# EAGLE board n64rgb2moutfilter_nutzen (EAGLE 9.5.2)
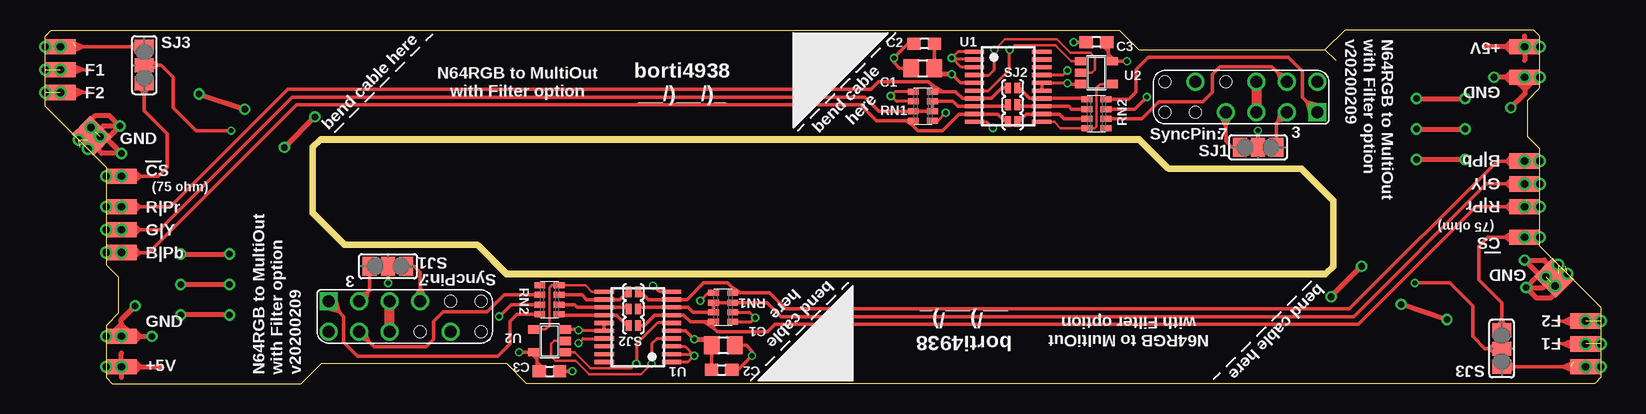
[diagram p0: board, top side]
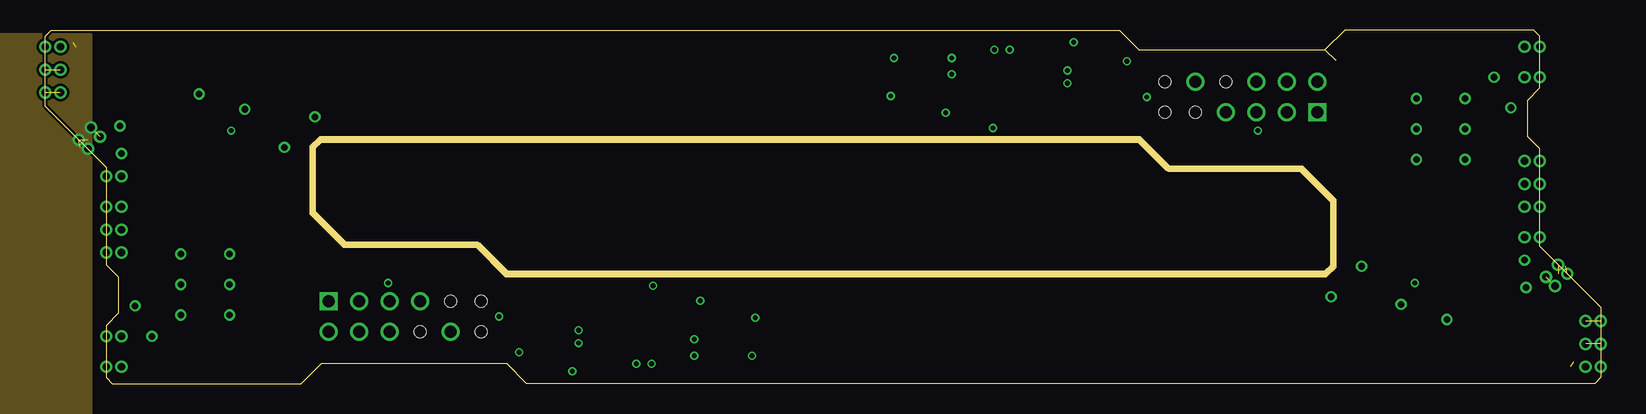
[diagram p1: board, inner layer Route2]
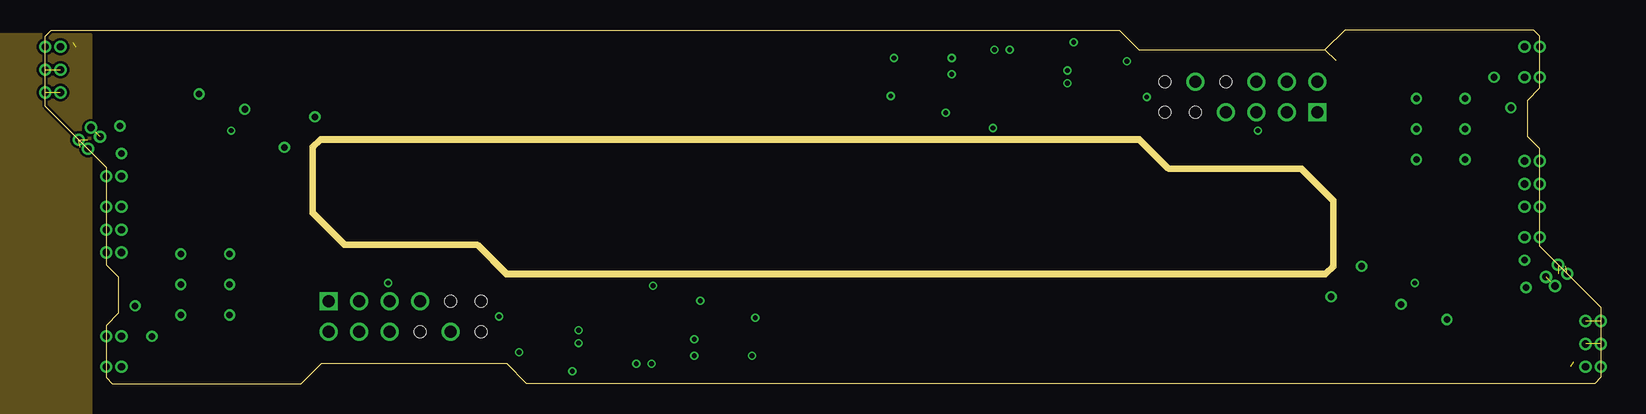
[diagram p2: board, inner layer Route15]
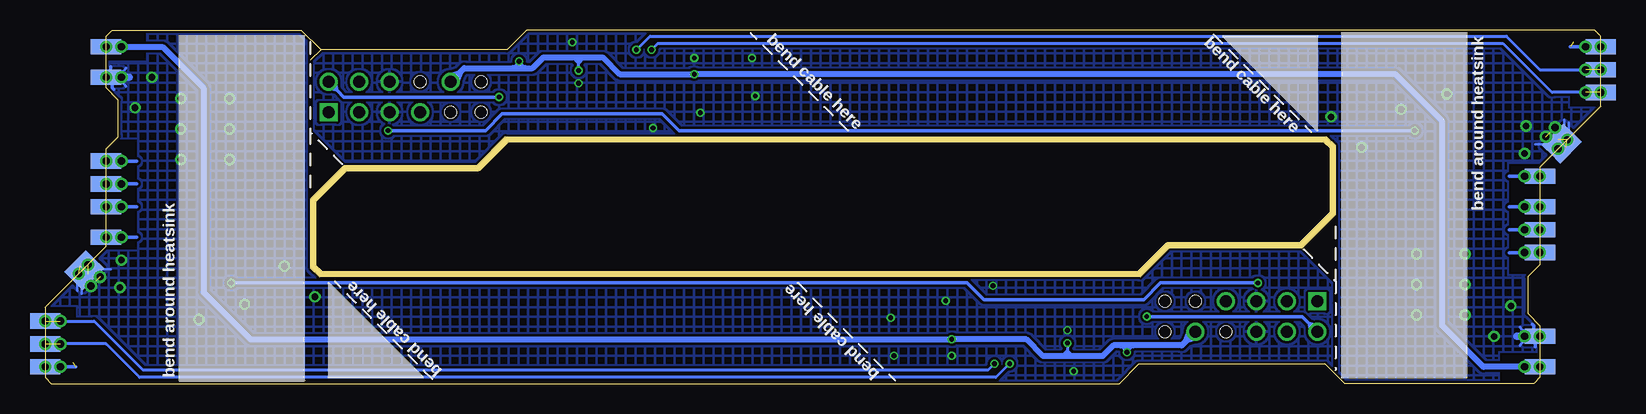
[diagram p3: board, bottom side, seen from below]

Size 129.67 x 29.46 mm. Coordinates in mm from the lower left corner, seen from the top.
Outline: 106.68,27.81 91.19,27.81 89.53,29.46 0.51,29.46 0,28.96 0,23.11 5.08,18.03 5.08,9.91 6.1,8.89 6.1,5.84 5.08,4.83 5.08,0.51 5.59,0 21.34,0 22.99,1.65 38.48,1.65 40.13,0 129.16,0 129.67,0.51 129.67,6.35 124.59,11.43 124.59,19.56 123.57,20.57 123.57,23.62 124.59,24.64 124.59,28.96 124.08,29.46 108.33,29.46 106.68,27.81
Outline: 106.68,27.81 107.57,26.92
Outline: 22.1,14.1 22.1,19.81 22.86,20.57 91.31,20.57 93.73,18.16 104.78,18.16 107.57,15.37 107.57,9.65 106.81,8.89 38.35,8.89 35.94,11.3 24.89,11.3 22.1,14.1
Copper layers (1*16): Top 0.018mm / dielectric 1.55mm / Bottom 0.018mm
Design rules "fpc": minimum track width 0.1mm, minimum drill 0.2mm, track to track 0.2mm, track to pad 0.2mm, pad to pad 0.2mm, via to via 0.2mm, smd to smd 0mil, copper to edge 0.2mm, drill to drill 0.2mm, minimum pad ring 0.125mm, minimum via ring 0.1mm, stop-mask expansion 2mil, vias tented up to drill 1mm, thermal gap 0.2mm
bRestrict: area 5.1,-0.3 to 8.4,2.5; area 5.1,9.1 to 7.6,18.3; area 0,23.1 to 2.5,32.3; area 121.3,26.9 to 124.6,29.7; area 122,11.2 to 124.6,20.3; area 127.1,-2.8 to 129.7,6.4; 6 lines
Milling: 12 lines

## Footprints (pad centres in the part's own frame; a part is rotated, then mirrored left to right if it is on the bottom)
SMD1,27-2,54 = smd 1.27 x 2.54: 1 0,0
C0805 = smd 1.3 x 1.5: 1 -0.95,0; 2 0.95,0
C0603 = smd 1.1 x 1: 1 -0.85,0; 2 0.85,0
SNES_MULTIAV_RGBSY = drill 1 square: 1 6.35,-1.27 | drill 1: 2 6.35,1.27; 3 3.81,-1.27; 4 3.81,1.27; 5 1.27,-1.27; 6 1.27,1.27; 7 -1.27,-1.27; 10 -3.81,1.27 | hole 1: -3.81,-1.27; -6.35,-1.27; -6.35,1.27; -1.27,1.27
CTS742C083 = smd 0.5 x 0.9: 1 -1.2,-0.8; 2 -0.4,-0.8; 3 0.4,-0.8; 4 1.2,-0.8; 5 1.2,0.8; 6 0.4,0.8; 7 -0.4,0.8; 8 -1.2,0.8
SJ_2 = smd 1.168 x 1.6: 1 -1.524,0; 2 0,0; 3 1.524,0
SJ_SMALL = smd 0.508 x 0.889: 1 -0.381,0; 2 0.381,0
THS7368 = smd 1.6 x 0.35: 1 -2.8,2.895; 2 -2.8,2.245; 3 -2.8,1.595; 4 -2.8,0.945; 5 -2.8,0.295; 6 -2.8,-0.355; 7 -2.8,-1.005; 8 -2.8,-1.655; 9 -2.8,-2.305; 10 -2.8,-2.955; 11 2.8,-2.955; 12 2.8,-2.305; 13 2.8,-1.655; 14 2.8,-1.005; 15 2.8,-0.355; 16 2.8,0.295; 17 2.8,0.945; 18 2.8,1.595; 19 2.8,2.245; 20 2.8,2.895
SOT23-5 = smd 0.69 x 0.99: 1 -0.95,-1.29; 2 0,-1.29; 3 0.95,-1.29; 4 0.95,1.3; 5 -0.95,1.3

## Placement (x,y rotation side)
B/PB  [SMD1,27-2,54]  6.35,10.92 90 top
B/PB1  [SMD1,27-2,54]  5.08,10.92 90 bottom
B/PB2  [SMD1,27-2,54]  123.32,18.54 270 top
B/PB3  [SMD1,27-2,54]  124.59,18.54 270 bottom
C1  22u  [C0805]  73.15,26.29 0 top
C2  0.1u  [C0603]  73.28,28.32 180 top
C3  0.1u  [C0603]  87.63,28.45 180 top
C4  22u  [C0805]  56.52,3.17 180 top
C5  0.1u  [C0603]  56.39,1.14 0 top
C6  0.1u  [C0603]  42.04,1.02 0 top
CS75#  [SMD1,27-2,54]  6.35,17.27 90 top
CS75#1  [SMD1,27-2,54]  5.08,17.27 90 bottom
CS75#2  [SMD1,27-2,54]  123.32,12.19 270 top
CS75#3  [SMD1,27-2,54]  124.59,12.19 270 bottom
CS#  [SMD1,27-2,54]  0,28.07 90 bottom
CS#1  [SMD1,27-2,54]  1.27,28.07 90 top
CS#2  [SMD1,27-2,54]  129.67,1.4 270 bottom
CS#3  [SMD1,27-2,54]  128.4,1.4 270 top
E$1  [SNES_MULTIAV_RGBSY]  99.69,23.88 0 top
E$2  [SNES_MULTIAV_RGBSY]  29.97,5.59 180 top
F1  [SMD1,27-2,54]  0,26.16 90 bottom
F2  [SMD1,27-2,54]  0,24.26 90 bottom
F3  [SMD1,27-2,54]  1.27,24.26 90 top
F4  [SMD1,27-2,54]  1.27,26.16 90 top
F5  [SMD1,27-2,54]  129.67,3.3 270 bottom
F6  [SMD1,27-2,54]  129.67,5.21 270 bottom
F7  [SMD1,27-2,54]  128.4,5.21 270 top
F8  [SMD1,27-2,54]  128.4,3.3 270 top
G/Y  [SMD1,27-2,54]  6.35,12.83 90 top
G/Y1  [SMD1,27-2,54]  5.08,12.83 90 bottom
G/Y2  [SMD1,27-2,54]  123.32,16.64 270 top
G/Y3  [SMD1,27-2,54]  124.59,16.64 270 bottom
P_GND1  [SMD1,27-2,54]  5.08,3.94 90 bottom
P_GND2  [SMD1,27-2,54]  6.35,3.94 90 top
P_GND3  [SMD1,27-2,54]  4.19,20.96 45 top
P_GND4  [SMD1,27-2,54]  3.56,20.32 45 top
P_GND5  [SMD1,27-2,54]  2.92,19.69 315 bottom
P_GND6  [SMD1,27-2,54]  3.56,20.32 315 bottom
P_GND7  [SMD1,27-2,54]  123.32,25.53 270 top
P_GND8  [SMD1,27-2,54]  125.48,8.51 225 top
P_GND9  [SMD1,27-2,54]  126.11,9.14 225 top
P_GND10  [SMD1,27-2,54]  124.59,25.53 270 bottom
P_GND11  [SMD1,27-2,54]  126.75,9.78 135 bottom
P_GND12  [SMD1,27-2,54]  126.11,9.14 135 bottom
P_VCC_5V  [SMD1,27-2,54]  6.35,1.4 90 top
P_VCC_5V1  [SMD1,27-2,54]  5.08,1.4 90 bottom
P_VCC_5V2  [SMD1,27-2,54]  123.32,28.07 270 top
P_VCC_5V3  [SMD1,27-2,54]  124.59,28.07 270 bottom
R/PR  [SMD1,27-2,54]  6.35,14.73 90 top
R/PR1  [SMD1,27-2,54]  5.08,14.73 90 bottom
R/PR2  [SMD1,27-2,54]  123.32,14.73 270 top
R/PR3  [SMD1,27-2,54]  124.59,14.73 270 bottom
RN1  75  [CTS742C083]  73.15,23.11 90 top
RN2  75  [CTS742C083]  87.63,22.48 270 top
RN3  75  [CTS742C083]  56.52,6.35 270 top
RN4  75  [CTS742C083]  42.04,6.99 90 top
SJ1  [SJ_2]  101.09,19.69 180 top
SJ2  [SJ_2]  28.57,9.78 0 top
SJ2B  [SJ_SMALL]  80.64,24.64 0 top
SJ2B1  [SJ_SMALL]  49.02,4.83 180 top
SJ2G  [SJ_SMALL]  80.64,23.24 0 top
SJ2G1  [SJ_SMALL]  49.02,6.22 180 top
SJ2R  [SJ_SMALL]  80.64,21.84 0 top
SJ2R1  [SJ_SMALL]  49.02,7.62 180 top
SJ3  [SJ_2]  8.26,26.54 270 top
SJ4  [SJ_2]  121.41,2.92 90 top
U1  [THS7368]  80.26,24.77 0 top
U2  [SOT23-5]  87.63,25.91 270 top
U3  [THS7368]  49.4,4.7 180 top
U4  [SOT23-5]  42.04,3.56 90 top

## Library data of the parts
B/PB B/PB1-B/PB3 CS75# CS75#1-CS75#3 CS# CS#1-CS#3 F1-F8 G/Y G/Y1-G/Y3 P_GND1-P_GND3 P_GND7 P_GND8 P_GND10 P_VCC_5V P_VCC_5V1-P_VCC_5V3 R/PR R/PR1-R/PR3 = wirepad@1
C1-C6 = rcl
E$1 E$2 U1 U3 = snes_div
P_GND4-P_GND6 P_GND9 P_GND11 P_GND12 = wirepad
RN1-RN4 = resistor-net
SJ1 SJ2 SJ2B SJ2B1 SJ2G SJ2G1 SJ2R SJ2R1 SJ3 SJ4 = jumper
U2 U4 = 74xx-little-de

## Nets
5V: C1.2 C2.1 C3.1 E$1.10 P_VCC_5V1.1 P_VCC_5V.1 U1.5 U1.17 U2.5
5V1: C4.2 C5.1 C6.1 E$2.10 P_VCC_5V2.1 P_VCC_5V3.1 U3.5 U3.17 U4.5
#CS: E$1.3 SJ1.1
#CS1: E$2.3 SJ2.1
#CS.75.I: CS75#1.1 CS75#.1 SJ3.3
#CS.75.I1: CS75#2.1 CS75#3.1 SJ4.3
#CS.I: CS#1.1 CS#.1 SJ3.1
#CS.I1: CS#2.1 CS#3.1 SJ4.1
#CS.SEL: SJ1.2 SJ3.2
#CS.SEL1: SJ2.2 SJ4.2
BLUE: B/PB1.1 B/PB.1 RN1.8 SJ2R.1 U1.9
BLUE1: B/PB2.1 B/PB3.1 RN3.8 SJ2R1.1 U3.9
BLUE.OUT: RN2.3 SJ2R.2 U1.12
BLUE.OUT1: RN4.3 SJ2R1.2 U3.12
BLUE.OUT.1: E$2.4 RN4.6
BLUE.OUT.75: E$1.4 RN2.6
BYPASS_SF: RN2.4 U1.11 U2.4
BYPASS_SF1: RN4.4 U3.11 U4.4
F1: F1.1 F4.1 U1.6 U2.1
F2: F2.1 F3.1 U1.4 U2.2
F3: F5.1 F8.1 U3.6 U4.1
F4: F6.1 F7.1 U3.4 U4.2
GND: C1.1 C2.2 C3.2 E$1.5 E$1.6 P_GND1.1 P_GND2.1 P_GND3.1 P_GND4.1 P_GND5.1 P_GND6.1 RN1.1 RN1.5 RN1.6 U1.1 U1.2 U1.3 U1.10 U1.15 U1.16 U2.3
GND1: C4.1 C5.2 C6.2 E$2.5 E$2.6 P_GND7.1 P_GND8.1 P_GND9.1 P_GND10.1 P_GND11.1 P_GND12.1 RN3.1 RN3.5 RN3.6 U3.1 U3.2 U3.3 U3.10 U3.15 U3.16 U4.3
GREEN: G/Y1.1 G/Y.1 RN1.2 RN1.3 RN1.7 SJ2G.1 U1.8
GREEN1: G/Y2.1 G/Y3.1 RN3.2 RN3.3 RN3.7 SJ2G1.1 U3.8
GREEN.OUT: RN2.2 SJ2G.2 U1.13
GREEN.OUT1: RN4.2 SJ2G1.2 U3.13
GREEN.OUT.1: E$2.2 RN4.7
GREEN.OUT.75: E$1.2 RN2.7
LUMA: E$1.7 SJ1.3
LUMA1: E$2.7 SJ2.3
RED: R/PR1.1 R/PR.1 RN1.4 SJ2B.1 U1.7
RED1: R/PR2.1 R/PR3.1 RN3.4 SJ2B1.1 U3.7
RED1.OUT: RN2.1 SJ2B.2 U1.14
RED1.OUT1: RN4.1 SJ2B1.2 U3.14
RED.OUT.1: E$2.1 RN4.8
RED.OUT.75: E$1.1 RN2.8

## Tracks (layer width: path | path; a pad name or v marks a point on that pad's centre or on a via)
5V  (via drill 0.4, 0.6)
  Top 0.254: v85.22,26.09 84.84,25.71 U1.17
  Top 0.305: C1.2 74.1,26.47 74.13,26.5 C2.1 | U1.5 76.29,25.06 v75.56,25.78 | v90.17,26.85 U2.5 88.65,27.14 88.65,27.43 | C3.1 88.65,28.28 88.65,27.69 | 88.65,27.43 88.65,27.69 | 88.65,27.69 88.14,28.19 | 88.65,27.43 89.15,26.92
  Top 0.406: P_VCC_5V.1 7.87,1.4 | 7.49,1.78 7.87,1.4 | 7.87,1.4 7.49,1.02 | 5.48,1.4 P_VCC_5V.1 | 7.87,1.4 9.53,1.4 | P_VCC_5V.1 6.35,2.54 | P_VCC_5V.1 6.35,0.51 | v75.56,25.78 74.61,25.78 C1.2
  Bottom 0.254: 85.22,26.67 85.22,27.18 | 85.22,26.67 84.71,27.18 | v85.22,26.09 85.22,26.67 | 85.22,26.67 85.72,27.18
  Bottom 0.305: 94.87,26.16 95.38,24.89 | 95,26.04 96.14,25.65 | 89.66,26.29 90.17,26.8 90.68,26.29 | v90.17,26.85 90.17,26.29
  Bottom 0.406: P_VCC_5V1.1 P_VCC_5V.1
  Bottom 0.508: P_VCC_5V.1 9.78,1.4 13.21,4.83 13.21,21.84 17.14,25.78 v75.56,25.78 81.79,25.78 83.19,27.18 84.71,27.18 85.22,27.18 85.72,27.18 88.14,27.18 89.03,26.29 89.66,26.29 90.17,26.29 90.68,26.29 94.74,26.29 94.87,26.16 95,26.04 E$1.10
  other vias: 5.08,1.4 6.35,1.4
5V1  (via drill 0.4, 0.6)
  Top 0.254: v44.45,3.37 44.83,3.75 U3.17
  Top 0.305: C4.2 55.56,3 55.54,2.97 C5.1 | U3.5 53.38,4.4 v54.1,3.68 | v39.5,2.61 U4.5 41.02,2.32 41.02,2.03 | C6.1 41.02,1.18 41.02,1.78 | 41.02,2.03 41.02,1.78 | 41.02,1.78 41.53,1.27 | 41.02,2.03 40.51,2.54
  Top 0.406: P_VCC_5V2.1 121.79,28.07 | 122.17,27.69 121.79,28.07 | 121.79,28.07 122.17,28.45 | 124.18,28.07 P_VCC_5V2.1 | 121.79,28.07 120.14,28.07 | P_VCC_5V2.1 123.32,26.92 | P_VCC_5V2.1 123.32,28.96 | v54.1,3.68 55.06,3.68 C4.2
  Bottom 0.254: 44.45,2.79 44.45,2.29 | 44.45,2.79 44.96,2.29 | v44.45,3.37 44.45,2.79 | 44.45,2.79 43.94,2.29
  Bottom 0.305: 34.8,3.3 34.29,4.57 | 34.67,3.43 33.53,3.81 | 40.01,3.17 39.5,2.67 38.99,3.17 | v39.5,2.61 39.5,3.17
  Bottom 0.406: P_VCC_5V3.1 P_VCC_5V2.1
  Bottom 0.508: P_VCC_5V2.1 119.89,28.07 116.46,24.64 116.46,7.62 112.52,3.68 v54.1,3.68 47.88,3.68 46.48,2.29 44.96,2.29 44.45,2.29 43.94,2.29 41.53,2.29 40.64,3.17 40.01,3.17 39.5,3.17 38.99,3.17 34.92,3.17 34.8,3.3 34.67,3.43 E$2.10
  other vias: 124.59,28.07 123.32,28.07
#CS
  Top 0.254: 103.76,22.1 102.74,21.84 103,22.86
  Top 0.305: E$1.3 102.74,21.84 102.62,21.72 SJ1.1
#CS1
  Top 0.254: 25.91,7.37 26.92,7.62 26.67,6.6
  Top 0.305: E$2.3 26.92,7.62 27.05,7.75 SJ2.1
#CS.75.I  (via drill 0.6)
  Top 0.305: CS75#1.1 CS75#.1 8,17.27 | 8,17.27 9.4,17.27 10.16,18.03 10.16,20.83 8.26,22.73 8.26,24.13 | 8,17.27 7.49,17.65 | 8,17.27 7.49,16.89 | 8.26,24.13 SJ3.3 | 8.26,24.13 8.76,24.89 | 8.26,24.13 7.75,24.89
  Bottom 0.305: CS75#1.1 7.62,17.27
  other vias: 5.08,17.27 6.35,17.27
#CS.75.I1  (via drill 0.6)
  Top 0.305: CS75#3.1 CS75#2.1 121.67,12.19 | 121.67,12.19 120.27,12.19 119.51,11.43 119.51,8.64 121.41,6.73 121.41,5.33 | 121.67,12.19 122.17,11.81 | 121.67,12.19 122.17,12.57 | 121.41,5.33 SJ4.3 | 121.41,5.33 120.9,4.57 | 121.41,5.33 121.92,4.57
  Bottom 0.305: CS75#3.1 122.05,12.19
  other vias: 124.59,12.19 123.32,12.19
#CS.I  (via drill 0.6)  (1 unrouted)
  Top 0.254: CS#1.1 3.17,28.07
  Top 0.305: 3.17,28.07 2.29,27.69 | 3.17,28.07 2.29,28.45 | 3.17,28.07 7.11,28.07 | 7.11,28.07 SJ3.1 | 7.11,28.07 7.62,28.45 | 7.11,28.07 7.62,27.69
  Bottom 0.203: -0.36,27.71 CS#.1
  Bottom 0.305: CS#.1 2.54,28.07
  other vias: 0,28.07 1.27,28.07
#CS.I1  (via drill 0.6)  (1 unrouted)
  Top 0.254: CS#3.1 126.49,1.4
  Top 0.305: 126.49,1.4 127.38,1.78 | 126.49,1.4 127.38,1.02 | 126.49,1.4 122.56,1.4 | 122.56,1.4 SJ4.1 | 122.56,1.4 122.05,1.02 | 122.56,1.4 122.05,1.78
  Bottom 0.203: 130.03,1.76 CS#2.1
  Bottom 0.305: CS#2.1 127.13,1.4
  other vias: 129.67,1.4 128.4,1.4
#CS.SEL  (via drill 0.4)
  Top 0.305: SJ1.2 v101.09,21.08 | v15.49,21.08 12.57,21.08 10.67,22.99 10.67,25.53 9.65,26.54 9.4,26.54 | 9.4,26.54 SJ3.2 | 9.4,26.54 8.76,26.16 | 9.4,26.54 8.76,26.92
  Bottom 0.305: v101.09,21.08 92.96,21.08 91.57,22.48 78.23,22.48 76.83,21.08 v15.49,21.08
#CS.SEL1  (via drill 0.4)
  Top 0.305: SJ2.2 v28.57,8.38 | v114.17,8.38 117.09,8.38 119,6.48 119,3.94 120.02,2.92 120.27,2.92 | 120.27,2.92 SJ4.2 | 120.27,2.92 120.9,3.3 | 120.27,2.92 120.9,2.54
  Bottom 0.305: v28.57,8.38 36.7,8.38 38.1,6.99 51.44,6.99 52.83,8.38 v114.17,8.38
+5V
  pour Route15 (rank 3): -22.86,29.08 -22.86,24.26 -22.1,23.5 -17.02,23.5 -16.51,22.99 -16.51,17.4 -16,16.89 -14.22,16.89 -9.14,11.81 -9.14,8.76 -9.65,8.25 -13.21,8.25 -13.72,7.75 -13.72,1.91 -13.21,1.4 -7.37,1.4 -6.86,0.89 -6.86,-2.92 -6.1,-3.68 3.81,-3.68 3.81,29.08
BLUE  (via drill 0.6)
  Top 0.254: 80.26,22.1 SJ2R.1
  Top 0.305: 7.87,10.92 B/PB.1 B/PB1.1 | 7.49,11.3 7.87,10.92 | 7.87,10.92 7.49,10.54 | 7.87,10.92 8.64,10.92 20.95,23.24 67.94,23.24 69.27,21.91 71.75,21.91 | 79.76,22.1 79.39,22.46 U1.9 76.18,22.46 74.8,21.08 72.77,21.08 72.35,21.5 | 79.76,22.1 80.26,22.1 | 71.75,21.91 RN1.8 72.35,21.5 | 71.75,21.91 72.35,21.5 | 79.76,22.1 80.26,21.59
  Bottom 0.305: B/PB1.1 7.62,10.92
  other vias: 5.08,10.92 6.35,10.92
BLUE1  (via drill 0.6)
  Top 0.254: 49.4,7.37 SJ2R1.1
  Top 0.305: 121.79,18.54 B/PB2.1 B/PB3.1 | 122.17,18.16 121.79,18.54 | 121.79,18.54 122.17,18.92 | 121.79,18.54 121.03,18.54 108.71,6.22 61.72,6.22 60.4,7.55 57.91,7.55 | 49.91,7.37 50.27,7 U3.9 53.49,7 54.86,8.38 56.9,8.38 57.31,7.96 | 49.91,7.37 49.4,7.37 | 57.91,7.55 RN3.8 57.31,7.96 | 57.91,7.55 57.31,7.96 | 49.91,7.37 49.4,7.87
  Bottom 0.305: B/PB3.1 122.05,18.54
  other vias: 124.59,18.54 123.32,18.54
BLUE.OUT
  Top 0.254: 81.03,22.1 SJ2R.2 | 81.41,22.1
  Top 0.305: 81.41,22.1 81.78,22.46 U1.12 84.54,22.46 84.92,22.08 RN2.3 | 81.03,22.1 81.41,22.1 81.03,21.59
BLUE.OUT1
  Top 0.254: 48.64,7.37 SJ2R1.2 | 48.25,7.37 48.26,7.37
  Top 0.305: 48.25,7.37 47.89,7 U3.12 45.12,7 44.74,7.38 RN4.3 | 48.64,7.37 48.26,7.37 48.64,7.87
BLUE.OUT.1
  Top 0.305: 26.92,3.56 27.43,3.05 31.75,3.05 32.38,3.68 32.38,5.21 33.15,5.97 36.83,5.97 38.25,7.38 RN4.6 | 26.92,3.56 E$2.4 | 26.92,3.56 25.78,3.94 | 26.92,3.56 26.54,4.7
BLUE.OUT.75
  Top 0.305: 102.74,25.91 102.23,26.42 97.92,26.42 97.28,25.78 97.28,24.26 96.52,23.5 92.84,23.5 91.42,22.08 RN2.6 | 102.74,25.91 E$1.4 | 102.74,25.91 103.89,25.53 | 102.74,25.91 103.12,24.77
BYPASS_SF
  Top 0.203: U1.11 84.11,21.81 84.64,21.28 RN2.4 87.45,21.28 87.63,21.46 87.63,24.64 87.95,24.96 U2.4
BYPASS_SF1
  Top 0.203: U3.11 45.56,7.65 45.03,8.18 RN4.4 42.22,8.18 42.04,8 42.04,4.83 41.72,4.51 U4.4
F1  (via drill 0.4, 0.6)  (1 unrouted)
  Top 0.203: v80.39,27.81 80.77,28.19 84.2,28.19 85.54,26.86 U2.1
  Top 0.254: F4.1 2.67,26.16 | 2.67,26.16 3.17,26.16 | 3.17,26.16 2.29,25.78 | 3.17,26.16 2.29,26.54 | U1.6 78.64,24.41 80.39,26.16 v80.39,27.81 | 3.17,26.16 3.68,26.16 | 2.67,26.16 2.54,26.04 2.54,26.29
  Bottom 0.254: v80.39,27.81 79.25,28.96 7.87,28.96 5.08,26.16 F1.1
  other vias: 0,26.16
F2  (via drill 0.4, 0.6)  (1 unrouted)
  Top 0.203: v79.12,27.81 80.01,28.7 84.33,28.7 85.47,27.56 87.12,27.56 87.5,27.18 87.5,26.16 87.25,25.91 U2.2
  Top 0.254: F3.1 2.67,24.26 | 2.67,24.26 3.17,24.26 | 3.17,24.26 2.29,24.64 | 3.17,24.26 2.41,23.88 | 3.17,24.26 3.68,24.26 | 2.67,24.26 2.54,24 | 2.67,24.26 2.54,24.38 | 78.16,25.71 U1.4 78.67,25.71 79.12,26.16 v79.12,27.81
  Bottom 0.254: v79.12,27.81 78.61,28.32 8.13,28.32 4.06,24.26 F2.1
  other vias: 0,24.26
F3  (via drill 0.4, 0.6)  (1 unrouted)
  Top 0.203: v49.28,1.65 48.9,1.27 45.47,1.27 44.13,2.61 U4.1
  Top 0.254: F8.1 127,3.3 | 127,3.3 126.49,3.3 | 126.49,3.3 127.38,3.68 | 126.49,3.3 127.38,2.92 | U3.6 51.03,5.05 49.28,3.3 v49.28,1.65 | 126.49,3.3 125.98,3.3 | 127,3.3 127.13,3.43 127.13,3.17
  Bottom 0.254: v49.28,1.65 50.42,0.51 121.79,0.51 124.59,3.3 F5.1
  other vias: 129.67,3.3
F4  (via drill 0.4, 0.6)  (1 unrouted)
  Top 0.203: v50.55,1.65 49.66,0.76 45.34,0.76 44.2,1.91 42.55,1.91 42.16,2.29 42.16,3.3 42.42,3.56 U4.2
  Top 0.254: F7.1 127,5.21 | 127,5.21 126.49,5.21 | 126.49,5.21 127.38,4.83 | 126.49,5.21 127.25,5.59 | 126.49,5.21 125.98,5.21 | 127,5.21 127.13,5.46 | 127,5.21 127.13,5.08 | 51.51,3.75 U3.4 51,3.75 50.55,3.3 v50.55,1.65
  Bottom 0.254: v50.55,1.65 51.05,1.14 121.54,1.14 125.6,5.21 F6.1
  other vias: 129.67,5.21
GND  (via drill 0.4, 0.55, 0.6)  (3 unrouted)
  Top 0.254: v75.56,27.14 75.69,27.01 U1.2 | U1.1 76.09,27.66 v75.56,27.14 | U1.3 76.34,26.36 v75.56,27.14 | U1.10 78.49,21.81 v78.99,21.3 | RN1.1 74.4,21.91 v75.06,22.57 | RN1.5 70.83,24.31 70.5,23.99 | 70.5,23.99 v70.48,23.97 | RN1.6 70.97,23.51 70.5,23.99 | v85.22,25.02 85.18,25.06 U1.16
  Top 0.305: P_GND2.1 P_GND1.1 | C2.2 71.92,28.32 v70.74,27.14 70.74,26.76 71.21,26.29 C1.1 | U1.16 U1.15 | U2.3 85.28,24.96 v85.22,25.02 | v85.72,28.45 C3.2
  Top 0.406: 7.87,3.94 P_GND2.1 6.35,4.95 | 7.87,3.94 v8.89,3.94 | 6.35,4.95 6.35,5.33 v7.49,6.48 | 6.35,4.95 6.99,4.32 | 6.35,4.95 5.71,4.32 | 7.49,4.32 7.87,3.94 | 7.87,3.94 7.49,3.56 | v6.22,21.46 4.83,21.46 4.57,21.21 v4.57,20.57 | 3.68,20.19 4.7,19.18 v6.35,19.18 4.95,20.57 | 3.68,20.19 P_GND6.1 4.32,20.32 v4.57,20.57 | 4.95,20.57 v4.57,20.57 | v6.22,21.46 5.33,20.57 4.95,20.57 | v6.22,21.46 5.36,22.33 4.17,22.33 3.68,21.84 3.68,20.19 | v11.3,10.79 v15.37,10.79 | v15.37,8.25 v11.3,8.25 | v15.37,5.71 v11.3,5.71 | v22.48,22.23 v19.94,19.69 | v12.83,24.13 v16.64,22.86
  Top 0.813: E$1.6 E$1.5
  Bottom 0.203: 2.67,21.72 2.67,21.21 3.05,20.83 | 3.05,20.83 P_GND6.1 | 5.46,19.94 3.94,19.94 P_GND6.1 | P_GND6.1 3.56,21.46 3.68,21.59 | 4.83,20.32 P_GND6.1 | 3.05,20.83 3.05,21.97
  Bottom 0.254: 6.73,4.7 6.35,4.32 P_GND2.1 6.35,3.56 6.73,3.17
  Bottom 0.305: P_GND2.1 5.59,3.94 | 5.59,3.94 5.59,4.83 5.71,4.95 | 5.59,3.94 5.46,3.81 5.46,3.05
  Bottom 0.406: v4.57,20.57 3.94,19.94 | P_GND5.1 3.43,19.69 v3.56,19.56
  Bottom 0.61: P_GND2.1 6.99,3.94
  other vias: 5.08,3.94 6.35,3.94 2.79,20.32 3.81,21.34
  pour Route2 (rank 2): -62.23,-9.02 3.81,-9.02 3.81,29.08 -62.23,29.08
  pour Bottom (hatched): 0,29.46 107.7,29.46 107.7,17.53 22.1,17.53 22.1,0 5.08,0 5.08,18.03 0,23.11
GND1  (via drill 0.4, 0.55, 0.6)  (3 unrouted)
  Top 0.254: v54.1,2.33 53.98,2.45 U3.2 | U3.1 53.58,1.8 v54.1,2.33 | U3.3 53.33,3.1 v54.1,2.33 | U3.10 51.18,7.65 v50.67,8.16 | RN3.1 55.27,7.55 v54.61,6.89 | RN3.5 58.84,5.15 59.16,5.48 | 59.16,5.48 v59.18,5.5 | RN3.6 58.69,5.95 59.16,5.48 | v44.45,4.45 44.49,4.4 U3.16
  Top 0.305: P_GND7.1 P_GND10.1 | C5.2 57.74,1.14 v58.93,2.33 58.93,2.71 58.46,3.17 C4.1 | U3.16 U3.15 | U4.3 44.39,4.51 v44.45,4.45 | v43.94,1.02 C6.2
  Top 0.406: 121.79,25.53 P_GND7.1 123.32,24.51 | 121.79,25.53 v120.78,25.53 | 123.32,24.51 123.32,24.13 v122.17,22.99 | 123.32,24.51 122.68,25.15 | 123.32,24.51 123.95,25.15 | 122.17,25.15 121.79,25.53 | 121.79,25.53 122.17,25.91 | v123.44,8 124.84,8 125.09,8.25 v125.09,8.89 | 125.98,9.27 124.97,10.29 v123.32,10.29 124.71,8.89 | 125.98,9.27 P_GND12.1 125.35,9.14 v125.09,8.89 | 124.71,8.89 v125.09,8.89 | v123.44,8 124.33,8.89 124.71,8.89 | v123.44,8 124.31,7.13 125.5,7.13 125.98,7.62 125.98,9.27 | v118.36,18.67 v114.3,18.67 | v114.3,21.21 v118.36,21.21 | v114.3,23.75 v118.36,23.75 | v107.19,7.24 v109.73,9.78 | v116.84,5.33 v113.03,6.6
  Top 0.813: E$2.6 E$2.5
  Bottom 0.203: 127,7.75 127,8.25 126.62,8.64 | 126.62,8.64 P_GND12.1 | 124.21,9.52 125.73,9.52 P_GND12.1 | P_GND12.1 126.11,8 125.98,7.87 | 124.84,9.14 P_GND12.1 | 126.62,8.64 126.62,7.49
  Bottom 0.254: 122.94,24.77 123.32,25.15 P_GND7.1 123.32,25.91 122.94,26.29
  Bottom 0.305: P_GND7.1 124.08,25.53 | 124.08,25.53 124.08,24.64 123.95,24.51 | 124.08,25.53 124.21,25.65 124.21,26.42
  Bottom 0.406: v125.09,8.89 125.73,9.52 | P_GND11.1 126.24,9.78 v126.11,9.91
  Bottom 0.61: P_GND7.1 122.68,25.53
  other vias: 124.59,25.53 123.32,25.53 126.87,9.14 125.86,8.13
  pour Bottom (hatched): 129.67,0 21.97,0 21.97,11.94 107.57,11.94 107.57,29.46 124.59,29.46 124.59,11.43 129.67,6.35
GREEN  (via drill 0.6)
  Top 0.305: 7.87,12.83 G/Y.1 G/Y1.1 | 7.49,12.45 7.87,12.83 | 7.49,13.21 7.87,12.83 | 7.87,12.83 9.53,12.83 20.57,23.88 68.33,23.88 69.49,22.71 RN1.7 RN1.2 RN1.3 75.67,23.51 76.08,23.11 U1.8 80.13,23.11 SJ2G.1
  Bottom 0.305: G/Y1.1 7.62,12.83
  other vias: 5.08,12.83 6.35,12.83
GREEN1  (via drill 0.6)
  Top 0.305: 121.79,16.64 G/Y2.1 G/Y3.1 | 122.17,17.02 121.79,16.64 | 122.17,16.26 121.79,16.64 | 121.79,16.64 120.14,16.64 109.09,5.59 61.34,5.59 60.18,6.75 RN3.7 RN3.2 RN3.3 53.99,5.95 53.59,6.35 U3.8 49.53,6.35 SJ2G1.1
  Bottom 0.305: G/Y3.1 122.05,16.64
  other vias: 124.59,16.64 123.32,16.64
GREEN.OUT
  Top 0.305: SJ2G.2 81.03,23.11 U1.13 85.33,23.11 85.56,22.88 RN2.2
GREEN.OUT1
  Top 0.305: SJ2G1.2 48.64,6.35 U3.13 44.34,6.35 44.11,6.58 RN4.2
GREEN.OUT.1  (via drill 0.4)
  Top 0.305: v37.85,5.59 38.84,6.58 RN4.7
  Bottom 0.254: 23.37,4.83 24.38,5.08 24.13,4.06
  Bottom 0.305: E$2.2 24.38,5.08 24.89,5.59 v37.85,5.59
GREEN.OUT.75  (via drill 0.4)
  Top 0.305: v91.82,23.88 90.82,22.88 RN2.7
  Bottom 0.254: 106.3,24.64 105.28,24.38 105.54,25.4
  Bottom 0.305: E$1.2 105.28,24.38 104.78,23.88 v91.82,23.88
LUMA
  Top 0.254: 97.92,22.35 98.42,21.46 98.93,22.35
  Top 0.305: E$1.7 98.42,21.46 98.42,20.19 98.93,19.69 SJ1.3
LUMA1
  Top 0.254: 31.75,7.11 31.24,8 30.73,7.11
  Top 0.305: E$2.7 31.24,8 31.24,9.27 30.73,9.78 SJ2.3
RED  (via drill 0.6)
  Top 0.305: 7.87,14.73 R/PR.1 R/PR1.1 | 7.49,14.35 7.87,14.73 | 7.87,14.73 7.49,15.11 | U1.7 76.82,23.76 | 7.87,14.73 10.41,14.73 20.19,24.51 68.83,24.51 69.47,25.15 73.63,25.15 73.9,24.88 | U1.7 78.88,23.76 79.76,24.64 SJ2B.1 | 73.9,24.88 73.95,24.82 RN1.4 74.8,24.31 | U1.7 76.44,23.76 75.89,24.31 74.8,24.31 | 73.9,24.88 74.8,24.31
  Bottom 0.305: R/PR1.1 7.62,14.73
  other vias: 5.08,14.73 6.35,14.73
RED1  (via drill 0.6)
  Top 0.305: 121.79,14.73 R/PR2.1 R/PR3.1 | 122.17,15.11 121.79,14.73 | 121.79,14.73 122.17,14.35 | U3.7 52.84,5.7 | 121.79,14.73 119.25,14.73 109.47,4.95 60.83,4.95 60.2,4.32 56.04,4.32 55.77,4.59 | U3.7 50.79,5.7 49.91,4.83 SJ2B1.1 | 55.77,4.59 55.72,4.64 RN3.4 54.86,5.15 | U3.7 53.22,5.7 53.78,5.15 54.86,5.15 | 55.77,4.59 54.86,5.15
  Bottom 0.305: R/PR3.1 122.05,14.73
  other vias: 124.59,14.73 123.32,14.73
RED1.OUT
  Top 0.305: 81.41,24.38 82.03,23.76 U1.14 86.75,23.76 RN2.1 | 81.41,24.38 81.03,24.38 SJ2B.2 | 81.41,24.38 81.03,24.77
RED1.OUT1
  Top 0.305: 48.26,5.08 47.64,5.7 U3.14 42.92,5.7 RN4.1 | 48.26,5.08 48.64,5.08 SJ2B1.2 | 48.26,5.08 48.64,4.7
RED.OUT.1
  Top 0.305: 24.51,5.97 24.89,5.59 24.89,3.43 26.04,2.29 37.72,2.29 38.73,3.3 38.73,5.19 39.33,5.79 RN4.8 | 24.51,5.97 E$2.1 | 24.51,5.97 23.11,6.35 | 24.51,5.97 24.13,7.37
RED.OUT.75
  Top 0.305: 105.16,23.5 104.78,23.88 104.78,26.04 103.63,27.18 91.95,27.18 90.93,26.16 90.93,24.28 90.33,23.68 RN2.8 | 105.16,23.5 E$1.1 | 105.16,23.5 106.55,23.11 | 105.16,23.5 105.54,22.1
S$1  (via drill 0.6)
  other vias: 128.4,3.3
S$2  (via drill 0.6)
  other vias: 1.27,26.16
S$3  (via drill 0.6)
  other vias: 1.27,24.26
S$5  (via drill 0.6)
  other vias: 128.4,5.21
VCCIO
  pour Route15 (rank 4): -52.45,29.08 -52.45,24.26 -49.28,24.26 -49.28,29.08 3.81,29.08 3.81,-9.02 -62.23,-9.02 -62.23,29.08

## Text on the board
tPlace: bend cable / here | bend cable here | bend cable here | bend cable / here
bPlace: bend cable here | bend cable here | bend cable here | bend cable here
tNames: N64RGB to MultiOut / with Filter option / v20200209 | +5V | F1 | SJ2 | N64RGB to MultiOut / with Filter option | borti4938 / __/)__/)_ | GND | F2 | 3 | GND | SyncPin: | 7 | B|Pb | CS | G|Y | (75 ohm) | R|Pr | R|Pr | (75 ohm) | G|Y | CS | B|Pb | SJ1 | GND | 3 | 7 | SyncPin: | RN2 | RN1 | F2 | GND | U2 | SJ2 | C1 | borti4938 / __/)__/)_ | N64RGB to MultiOut / with Filter option | F1 | C3 | U1 | SJ3 | +5V | N64RGB to MultiOut / with Filter option / v20200209 | C2
bNames: bend around heatsink | bend around heatsink
tDocu: Flex-PCB (c) 2019, 2020 Peter Bartmann